# Altium PCB Sensor_PCB_S201_Flex.PcbDoc
Units mm, origin at the board's own origin, x right, y up, seen from the top; angles counter-clockwise.
Board outline 102 x 4 mm, 2 copper layers (1-SIG-TOP, 2-SIG_BOT), stack 0.109 mm thick; 21 components, 17 nets, 66 pads, 180 vias.
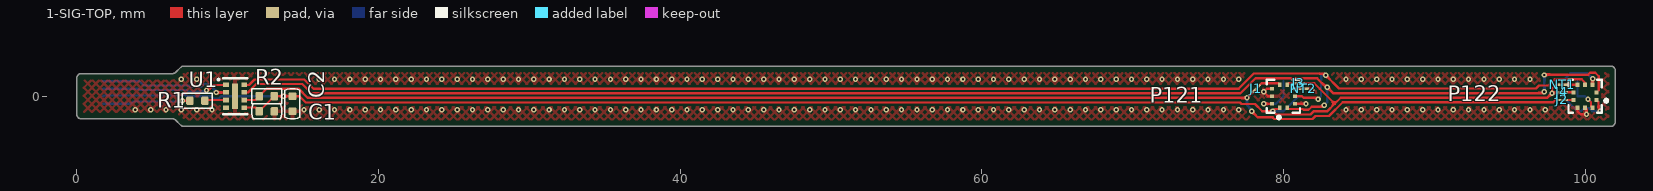
[diagram p0: 1-SIG-TOP view]
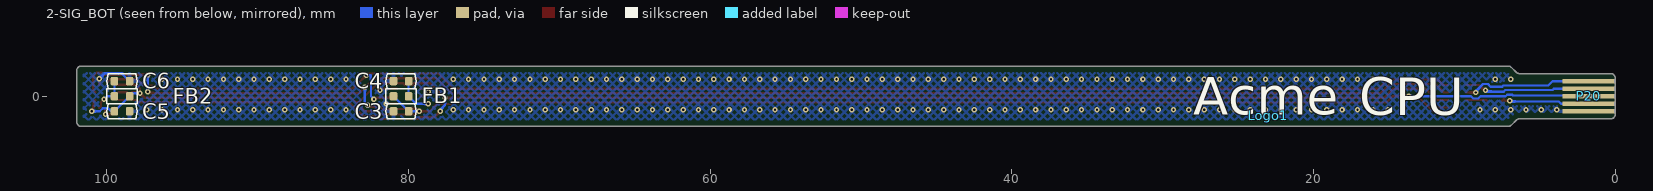
[diagram p1: 2-SIG_BOT view, seen from below]
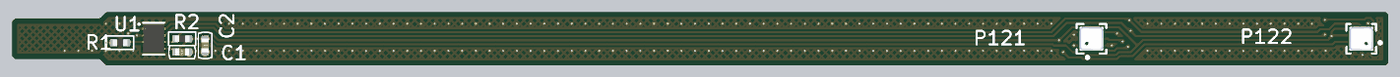
[diagram p2: 3D render of the assembled board from above, using the file's embedded part models]
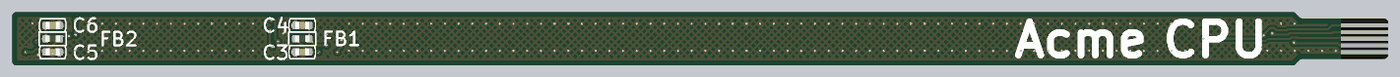
[diagram p3: 3D render of the assembled board from below, using the file's embedded part models]

## Layer stack, top to bottom
Top Solder: solder mask 0.0275, PI + Adhesive, Dk 3.4
1-SIG-TOP: signal copper 0.035
Dielectric 1: dielectric 0.0385, PI, Dk 3.4
2-SIG_BOT: signal copper 0.035
Bottom Solder: solder mask 0.0275, PI + Adhesive, Dk 3.4

## Board outline
0.3,-1.5 6.353,-1.5 6.353,-1.501 cw(c6.353,-1.801) 6.565,-1.589 6.888,-1.912 ccw(c7.1,-1.7) 7.1,-2 101.7,-2 ccw(c101.7,-1.7) 102,-1.7 102,1.7 ccw(c101.7,1.7) 101.7,2 7.1,2 ccw(c7.1,1.7) 6.888,1.912 6.565,1.589 cw(c6.353,1.801) 6.353,1.501 6.353,1.5 0.3,1.5 ccw(c0.3,1.2) 0,1.2 0,-1.2 ccw(c0.3,-1.2)

## Design rules (kind name [scope] priority, off if disabled: settings)
BoardOutlineClearance BoardOutlineClearance_LayerStack [WithinRoom('PCB_Stackup')] p1: gap=0 ignorepadtopadclearanceinfootprint=FALSE
BoardOutlineClearance BoardOutlineClearance_EDGE_Connector [HasFootprint('5-PIN FPC BOARD EDGE CONNECTOR 0.5MM')] p2: gap=0 ignorepadtopadclearanceinfootprint=FALSE
BoardOutlineClearance BoardOutlineClearance_LayerNames [WithinRoom('Layer_Names')] p3: gap=0 ignorepadtopadclearanceinfootprint=FALSE
BoardOutlineClearance BoardOutlineClearance_Overlays [OnBottomSilkscreen or OnTopSilkscreen] p4: gap=0 ignorepadtopadclearanceinfootprint=FALSE
BoardOutlineClearance BoardOutlineClearance_NearEdgeConnector [WithinRoom('NearEdgeConnector_OutlineClearance')] p5 off: gap=0.35 ignorepadtopadclearanceinfootprint=FALSE
BoardOutlineClearance [All] p6: gap=0.35 ignorepadtopadclearanceinfootprint=FALSE
Clearance [All] p1: gap=0.152 ignorepadtopadclearanceinfootprint=FALSE
ComponentClearance ComponentClearance_NetTie [HasFootprint('Net Tie 6x30mil')] p1: gap=0 collisioncheckmode=3 verticalgap=0 showdistances=FALSE
ComponentClearance ComponentClearance_PCB_Stackup [WithinRoom('PCB_Stackup')] p2: gap=0 collisioncheckmode=3 verticalgap=0 showdistances=FALSE
ComponentClearance [All] p3: gap=0.305 collisioncheckmode=3 verticalgap=0 showdistances=FALSE
DiffPairsRouting [All] p1: maxlimit=0.152 minlimit=0.127 mostfreqgap=0.152 toplayer_minwidth=0.127 toplayer_maxwidth=0.152 toplayer_prefwidth=0.152 bottomlayer_minwidth=0.127 bottomlayer_maxwidth=0.152 bottomlayer_prefwidth=0.152 maxuncoupledlength=12.7
HoleSize [All] p1: absolutevalues=TRUE maxlimit=2.54 minlimit=0.15 maxpercent=80.000 minpercent=20.000
HoleToHoleClearance [All] p1: gap=0.254 allowstackedmicrovias=FALSE
MinimumAnnularRing MinimumAnnularRing_Via_Int [IsVia and not (OnTopLayer or OnBottomLayer)] p1: minimumring=0
MinimumAnnularRing [All] p2: minimumring=0.152
MinimumSolderMaskSliver [All] p1: minsoldermaskwidth=0.076
PlaneClearance [All] p1: clearance=0.203
PlaneConnect PlaneConnect_Via [IsVia] p1: planeconnectstyle=Direct reliefexpansion=0.508 reliefentries=4 reliefconductorwidth=0.254 reliefairgap=0.254
PlaneConnect PlaneConnect_HeatTrap [All] p2: pad.planeconnectstyle=Relief pad.reliefexpansion=0.152 pad.reliefentries=4 pad.reliefconductorwidth=0.152 pad.reliefairgap=0.152 via.planeconnectstyle=Direct via.reliefexpansion=0.203 via.reliefentries=4 via.reliefconductorwidth=0.254 via.reliefairgap=0.254
PolygonConnect PolygonConnect_Via [IsVia] p1: connectstyle=Direct reliefconductorwidth=0.254 reliefentries=4 polygonreliefangle="90 Angle" airgapwidth=0.254
PolygonConnect PolygonConnect_TestPoints [InComponentClass('TestPoint')] p2: connectstyle=Direct reliefconductorwidth=0.254 reliefentries=4 polygonreliefangle="90 Angle" airgapwidth=0.254
PolygonConnect PolygonConnect_ThermPads [HasFootprintPad('DFN65P100X40-4N','5') or HasFootprintPad('WSON-6 065','7') or HasFootprintPad('SOT908-1','9')] p3: connectstyle=Direct reliefconductorwidth=0.254 reliefentries=4 polygonreliefangle="90 Angle" airgapwidth=0.254
PolygonConnect [All] p4: thpad.connectstyle=Relief thpad.reliefconductorwidth=0.381 thpad.reliefentries=4 thpad.polygonreliefangle="90 Angle" thpad.airgapwidth=0.203 smdpad.connectstyle=Relief smdpad.reliefconductorwidth=0.254 smdpad.reliefentries=4 smdpad.polygonreliefangle="90 Angle" smdpad.airgapwidth=0.203 via.connectstyle=Direct via.reliefconductorwidth=0.254 via.reliefentries=4 via.polygonreliefangle="90 Angle" via.airgapwidth=0.254
RoomDefinition Layer_Names [False] p1: confinementstyle=ConfineIn formatcopy=TRUE lockcomponents=FALSE outline 127.5,47.5 147.5,47.5 147.5,37.5 127.5,37.5
RoomDefinition NearEdgeConnector_OutlineClearance [False] p2: confinementstyle=ConfineIn formatcopy=TRUE lockcomponents=FALSE outline 0,1.5 7.5,1.5 7.5,-1.5 0,-1.5
RoomDefinition P122 [InComponentClass('P122')] p3: confinementstyle=ConfineIn formatcopy=TRUE lockcomponents=FALSE outline 98,1.5 98,-1.5 102,-1.5 102,1.5
RoomDefinition P121 [InComponentClass('P121')] p4: confinementstyle=ConfineIn formatcopy=TRUE lockcomponents=FALSE outline 78,1.5 78,-1.5 82,-1.5 82,1.5
RoutingVias [All] p1: holewidth=0.15 width=0.5 viastyle="Through Hole" minholewidth=0.15 minwidth=0.35 maxholewidth=0.5 maxwidth=0.7
SilkToSilkClearance [All] p1: silktosilkclearance=0.025
SilkToSolderMaskClearance [IsPad] p1: minsilkscreentomaskgap=0.102 clearancetoexposedcopper=FALSE
SolderMaskExpansion [All] p1: expansion=0.051
Width [All] p1: maxlimit=5.08 minlimit=0.152 preferedwidth=0.254
21 further rules are at their usual default settings.

## Classes and differential pairs
component class P121: C3 C4 FB1 NT2 P121
component class P122: C5 C6 FB2 NT1 P122
channel class BMP388_Digital_Pressure_Sensor: P121 P122
component class "Net Tie": J1 J2 J3 J4
component class PCB_FEATURE: Logo1

## Components (designator, comment, footprint, x,y, rotation, side; value= is the part's Value field where it differs from the comment)
C1 "CAP CER 0.1UF 50V X7R 0402" C0402 12.6,-1 r0 top
C2 "CAP CER 1UF 6.3V X5R 0402" C0402 14.3,-0.5 r90 top
C3 "CAP CER 0.1UF 16V X7R 0402" C0402 80.5,-1 r180 bottom (schematic designator C1)
C4 "CAP CER 0.1UF 16V X7R 0402" C0402 80.5,1 r0 bottom (schematic designator C2)
C5 "CAP CER 0.1UF 16V X7R 0402" C0402 99,-1 r0 bottom (schematic designator C1)
C6 "CAP CER 0.1UF 16V X7R 0402" C0402 99,1 r180 bottom (schematic designator C2)
FB1 "FERRITE BEAD 1 KOHM 0402 1LN" L0402 80.5,0 r180 bottom
FB2 "FERRITE BEAD 1 KOHM 0402 1LN" L0402 99,0 r0 bottom (schematic designator FB1)
J1 "Net Tie" "NET TIE 6X30MIL" 78.2,0.5 r45 top net-tie
J2 "Net Tie" "NET TIE 6X30MIL" 98.5,-0.25 r0 top net-tie
J3 "Net Tie" "NET TIE 6X30MIL" 81,0.854 r180 top net-tie
J4 "Net Tie" "NET TIE 6X30MIL" 98.5,0.255 r0 top net-tie
Logo1 "Logo ACME_CPU" LOGO_ACME_CPU 23,-1.3 r180 bottom (schematic designator Logo)
NT1 "Net Tie" "NET TIE 6X30MIL" 98.5,0.762 r180 top net-tie
NT2 "Net Tie" "NET TIE 6X30MIL" 81.322,0.5 r0 top net-tie
P20 "S201" "5-PIN FPC BOARD EDGE CONNECTOR 0.5MM" 1.75,0 r0 bottom
P121 "BMP388" QFN_BMP388_BOS 80,0 r90 top (schematic designator U1)
P122 "BMP388" QFN_BMP388_BOS 100,0 r180 top (schematic designator U1)
R1 "RES SMD 0 OHM JUMPER 1/16W 0402" R0402 8,-0.3 r180 top
R2 "DNP*" R0402 12.6,0 r0 top
U1 "TPD3F303DPVR" DPV8_1P7X0P4 10.5,0 r0 top

## Footprints (in the part's own frame and the unit in brackets; to place one, negate y for a bottom-side part, rotate by r counter-clockwise, add the part's x,y. Pads: shape width x height; smd on the part's side, far side on the other; paste and mask are expansions set on the pad)
"5-PIN FPC BOARD EDGE CONNECTOR 0.5MM" [mm] "5 Position FFC, FPC Connector Contacts, Top 0.020\" (0.50mm)"
  rect 3.5x0.3 smd paste+0 mask+0: 1(0,-1) 2(0,-0.5) 3(0,0) 4(0,0.5) 5(0,1)
C0402 [mm]
  rrect35% 0.5x0.55 smd: 1(-0.5,0) 2(0.5,0)
  silkscreen extent -1,-0.5 1,0.5, body extent -0.52,-0.28 0.52,0.28, height 0.55
DPV8_1P7X0P4 [mm]
  rect 0.38x0.3 smd paste+0 mask+0.05: 1(-0.61,0.75) 2(-0.61,0.25) 3(-0.61,-0.25) 4(-0.61,-0.75) 5(0.61,-0.75) 6(0.61,-0.25) 7(0.61,0.25) 8(0.61,0.75)
  rect 0.4x1.7 smd paste-0.837 mask+0.05: 9(0,0)
  silkscreen extent -1.15,-1.2 0.8,1.2, body extent -0.8,-1.05 0.8,1.05, height 0.65
L0402 [mm]
  rrect35% 0.5x0.55 smd: 1(-0.5,0) 2(0.5,0)
  silkscreen extent -1,-0.51 1,0.5, body extent -0.53,-0.25 0.53,0.25, height 0.71
LOGO_ACME_CPU [mm]
"NET TIE 6X30MIL" [mil]
  rect 16x6 smd paste-5 mask-5: 1(-7,0) 2(7,0)
QFN_BMP388_BOS [mm]
  rect 0.275x0.25 smd paste+0 mask+0.05: 1(-0.762,0.25) 2(-0.762,-0.25) 6(0.762,-0.25) 7(0.762,0.25)
  rect 0.25x0.275 smd paste+0 mask+0.05: 3(-0.5,-0.762) 4(0,-0.762) 5(0.5,-0.762) 8(0.5,0.762) 9(0,0.762) 10(-0.5,0.762)
  silkscreen extent -1.5,-1.1 1.1,1.1, body extent -1,-1 1,1, height 0.8
R0402 [mm]
  rrect35% 0.5x0.55 smd: 1(-0.5,0) 2(0.5,0)
  silkscreen extent -1,-0.51 1,0.5, body extent -0.53,-0.25 0.53,0.25, height 0.71

## Part data
C1: "0.1µF ±10% 50V Ceramic Capacitor X7R 0402 (1005 Metric)", Capacitance=100nF, Case/Package=0402, Case Code (Metric)=1005, Dielectric=X7R, Manufacturer=TDK, Manufacturer Part Number=CGA2B3X7R1H104K050BB, Max Operating Temperature=125°C, Min Operating Temperature=-55°C, Package Quantity=1, Ratings=AEC-Q200, Supplier Part Number 1=445-6899-1-ND, Tolerance=10%, Voltage=50V, Case Code (Imperial)=0402, ComponentLink1Description=http://product.tdk.com/capacitor/mlcc/en/documents/mlccspec_automotive_general_midvoltage_en.pdf?src-supplier=Future+Electronics, ComponentLink1URL=http://product.tdk.com/capacitor/mlcc/en/documents/mlccspec_automotive_general_midvoltage_en.pdf?src-supplier=Future+Electronics, ComponentLink2Description=http://www.farnell.com/datasheets/1807242.pdf?src-supplier=Element14, ComponentLink2URL=http://www.farnell.com/datasheets/1807242.pdf?src-supplier=Element14, ComponentLink3Description=http://www.mouser.com/ds/2/400/lcc_automotive_general_en-843974.pdf?src-supplier=Mouser, ComponentLink3URL=http://www.mouser.com/ds/2/400/lcc_automotive_general_en-843974.pdf?src-supplier=Mouser, ComponentLink4Description=http://www.farnell.com/datasheets/1936565.pdf?src-supplier=Element14, ComponentLink4URL=http://www.farnell.com/datasheets/1936565.pdf?src-supplier=Element14, ComponentLink5Description=http://www.farnell.com/datasheets/1735392.pdf?src-supplier=Element14, ComponentLink5URL=http://www.farnell.com/datasheets/1735392.pdf?src-supplier=Element14, Composition=Ceramic, Depth=0.5mm, Height=0.5mm, Lead Free="Lead Free", Length=1mm, Mount="Surface Mount", Packaging="Tape and Reel", Pricing 1="1=0.17, 10=0.118, 50=0.0668, 100=0.0553, 500=0.0388, 1000=0.0321, 2500=0.0299, 5000=0.0273 (USD)", REACH SVHC="No SVHC", Stock 1=2925303, Supplier 1=Digi-Key, Termination=SMD/SMT, Thickness=0.022inch, Voltage Rating=50V, Voltage Rating (DC)=50V, Weight=2.3E-05oz, Width=0.02inch
C2: "1µF ±10% 6.3V Ceramic Capacitor X5R 0402 (1005 Metric)", Capacitance=1uF, Case/Package=0402, Case Code (Metric)=1005, Dielectric=X5R, Dielectric Material=Ceramic, Manufacturer=Yageo, Manufacturer Part Number=CC0402KRX5R5BB105, Max Operating Temperature=85°C, Min Operating Temperature=-55°C, Package Quantity=1, Supplier Part Number 1=311-1438-1-ND, Tolerance=10%, Voltage Rating=6.3V, Case Code (Imperial)=0402, ComponentLink1Description=http://www.farnell.com/datasheets/70765.pdf?src-supplier=Farnell, ComponentLink1URL=http://www.farnell.com/datasheets/70765.pdf?src-supplier=Farnell, ComponentLink2Description=http://www.yageo.com/documents/recent/UPY-GPHC_X5R_4V-to-50V_25.pdf?src-supplier=Digi-Key, ComponentLink2URL=http://www.yageo.com/documents/recent/UPY-GPHC_X5R_4V-to-50V_25.pdf?src-supplier=Digi-Key, ComponentLink3Description=http://www.farnell.com/datasheets/2167237.pdf?src-supplier=Element14, ComponentLink3URL=http://www.farnell.com/datasheets/2167237.pdf?src-supplier=Element14, ComponentLink4Description=http://www.yageo.com/documents/recent/UPY-GPHC_X5R_4V-to-50V_12.pdf?src-supplier=Avnet+Europe, ComponentLink4URL=http://www.yageo.com/documents/recent/UPY-GPHC_X5R_4V-to-50V_12.pdf?src-supplier=Avnet+Europe, ComponentLink5Description=http://www.farnell.com/datasheets/1359354.pdf?src-supplier=Element14, ComponentLink5URL=http://www.farnell.com/datasheets/1359354.pdf?src-supplier=Element14, ComponentLink6Description=http://www.farnell.com/datasheets/70765.pdf?src-supplier=Element14, ComponentLink6URL=http://www.farnell.com/datasheets/70765.pdf?src-supplier=Element14, ComponentLink7Description=http://www.yageo.com/documents/recent/UPY-GPHC_X5R_4V-to-50V_12.pdf?src-supplier=Avnet, ComponentLink7URL=http://www.yageo.com/documents/recent/UPY-GPHC_X5R_4V-to-50V_12.pdf?src-supplier=Avnet, Composition=Ceramic, Depth=0.5mm, Halogen Free="Halogen Free", Height=0.5mm, Lead Free="Lead Free", Length=1mm, Mount="Surface Mount", Number of Pins=2, Packaging="Tape and Reel", Pricing 1="1=0.1, 10=0.05, 50=0.0272, 100=0.0222, 500=0.0158, 1000=0.0124, 2500=0.0113, 5000=0.0104 (USD)", Radiation Hardening=No, REACH SVHC="No SVHC", Stock 1=34926286, Supplier 1=Digi-Key, Termination=SMD/SMT, Thickness=0.022inch, Voltage Rating (DC)=6.3V, Width=0.02inch
C3 C4 C5 C6: "0.1µF ±10% 16V Ceramic Capacitor X7R 0402 (1005 Metric)", Capacitance=100nF, Case Code (Imperial)=0402, Case Code (Metric)=1005, Dielectric=X7R, Manufacturer=YAGEO, Manufacturer Part Number=CC0402KRX7R7BB104, Max Operating Temperature=125°C, Min Operating Temperature=-55°C, Package Quantity=1, Supplier Part Number 1=311-1338-1-ND, Tolerance=10%, Voltage=16V, ComponentLink1Description=http://www.yageo.com/documents/recent/UPY-GPHC_X7R_6.3V-to-50V_8.pdf?src-supplier=Avnet+Europe, ComponentLink1URL=http://www.yageo.com/documents/recent/UPY-GPHC_X7R_6.3V-to-50V_8.pdf?src-supplier=Avnet+Europe, ComponentLink2Description=http://www.yageo.com/documents/recent/UPY-GPHC_X7R_6.3V-to-50V_18.pdf?src-supplier=Digi-Key, ComponentLink2URL=http://www.yageo.com/documents/recent/UPY-GPHC_X7R_6.3V-to-50V_18.pdf?src-supplier=Digi-Key, ComponentLink3Description=http://www.yageo.com/documents/recent/UPY-GPHC_X7R_6.3V-to-50V_8.pdf?src-supplier=Avnet, ComponentLink3URL=http://www.yageo.com/documents/recent/UPY-GPHC_X7R_6.3V-to-50V_8.pdf?src-supplier=Avnet, ComponentLink4Description=http://www.yageo.com/documents/recent/UPY-GPHC_X7R_6.3V-to-50V_18.pdf?src-supplier=Mouser, ComponentLink4URL=http://www.yageo.com/documents/recent/UPY-GPHC_X7R_6.3V-to-50V_18.pdf?src-supplier=Mouser, ComponentLink5Description=http://www.farnell.com/datasheets/2167236.pdf?src-supplier=Element14, ComponentLink5URL=http://www.farnell.com/datasheets/2167236.pdf?src-supplier=Element14, ComponentLink6Description=http://www.farnell.com/datasheets/1489800.pdf?src-supplier=Element14, ComponentLink6URL=http://www.farnell.com/datasheets/1489800.pdf?src-supplier=Element14, Composition=Ceramic, Depth=0.5mm, Halogen Free="Halogen Free", Height=0.5mm, Lead Free="Lead Free", Length=1mm, Mount="Surface Mount", Number of Pins=2, Order=CC0402KRX7R7BB104, Packaging="Tape and Reel", Pricing 1="1=0.1, 10=0.031, 100=0.0136, 500=0.0097, 1000=0.0077, 2500=0.007, 5000=0.0064 (USD)", Radiation Hardening=No, REACH SVHC="No SVHC", Revision="July-2002: Re-released for DXP Platform.", Stock 1=25916830, Supplier 1=Digi-Key, Termination=SMD/SMT, Thickness=0.022inch, Voltage Rating=16V, Voltage Rating (DC)=16V, Width=0.02inch
FB1 FB2: "1 kOhms @ 100MHz 1  Ferrite Bead 0402 (1005 Metric) 350mA 490mOhm", Case/Package=0402, Case Code (Metric)=1005, Current Rating=350mA, DC Resistance (DCR)=490mR, Manufacturer=Murata, Manufacturer Part Number=BLM15AX102SN1D, Max Operating Temperature=125°C, Min Operating Temperature=-55°C, Package Quantity=1, Supplier Part Number 1=490-5442-1-ND, Test Frequency=100MHz, Tolerance=25%, Case Code (Imperial)=0402, ComponentLink1Description=https://www.murata.com/en-us/products/productdata/8796740059166/ENFA0018.pdf?src-supplier=Digi-Key, ComponentLink1URL=https://www.murata.com/en-us/products/productdata/8796740059166/ENFA0018.pdf?src-supplier=Digi-Key, ComponentLink2Description=http://search.murata.co.jp/Ceramy/image/img/PDF/ENG/L0110S0100BLM15AX_SN.pdf?src-supplier=Future+Electronics, ComponentLink2URL=http://search.murata.co.jp/Ceramy/image/img/PDF/ENG/L0110S0100BLM15AX_SN.pdf?src-supplier=Future+Electronics, ComponentLink3Description=http://www.produktinfo.conrad.com/datenblaetter/1100000-1199999/001171674-da-01-en-CHIP_DROSSEL0402_1000R_350MA_1_0X0_5MM.pdf?src-supplier=Conrad, ComponentLink3URL=http://www.produktinfo.conrad.com/datenblaetter/1100000-1199999/001171674-da-01-en-CHIP_DROSSEL0402_1000R_350MA_1_0X0_5MM.pdf?src-supplier=Conrad, ComponentLink4Description=http://www.produktinfo.conrad.com/datenblaetter/1100000-1199999/001172166-da-01-en-DROSSEL_0402_1000R_31_0X0_5MM_10000ST.pdf?src-supplier=Conrad, ComponentLink4URL=http://www.produktinfo.conrad.com/datenblaetter/1100000-1199999/001172166-da-01-en-DROSSEL_0402_1000R_31_0X0_5MM_10000ST.pdf?src-supplier=Conrad, Depth=0.5mm, Height=0.5mm, Impedance=1kR, Lead Free="Lead Free", Length=1mm, Material=Ferrite,Steel, Max Current Rating=350mA, Max DC Current=350mA, Number of Circuits=1, Number of Lines=1, Number of Pins=2, Packaging="Tape and Reel", Pricing 1="1=0.11, 10=0.09, 25=0.0812, 50=0.0596, 100=0.0514, 250=0.0406, 500=0.0343, 1000=0.0289, 5000=0.0257 (USD)", REACH SVHC="No SVHC", Stock 1=138597, Supplier 1=Digi-Key, Termination=SMD/SMT, Width=0.5mm
J1 J2 J3 J4 NT1 NT2: library part "Net Tie Line"
  J1 J2 J3 J4: ClassName="Net Tie"
  NT1: ClassName=P122
  NT2: ClassName=P121
P20: library part "CONN HEADER TH R/A 5POS 1.5MM", "Connector Header Through Hole, Right Angle 5 position 0.059\" (1.50mm)", Color=Natural, Contact Resistance=30mR, Current Rating=1A, Housing Color=Beige, Manufacturer=JST, Manufacturer Part Number=S5B-ZR(LF)(SN), Max Operating Temperature=85°C, Max Voltage Rating (AC)=50V, Min Operating Temperature=-25°C, Supplier Part Number 1=455-1672-ND, ComponentLink1Description=http://www.jst-mfg.com/product/pdf/eng/eZH.pdf?src-supplier=Digi-Key, ComponentLink1URL=http://www.jst-mfg.com/product/pdf/eng/eZH.pdf?src-supplier=Digi-Key, ComponentLink2Description=https://www.verical.com/server-webapp/html/getDatasheet?partID=640593&src-supplier=Verical, ComponentLink2URL=https://www.verical.com/server-webapp/html/getDatasheet?partID=640593&src-supplier=Verical, ComponentLink3Description=http://www1.futureelectronics.com/doc/JST/S5B-ZR(LF)(SN).pdf?src-supplier=Future+Electronics, ComponentLink3URL=http://www1.futureelectronics.com/doc/JST/S5B-ZR(LF)(SN).pdf?src-supplier=Future+Electronics, ComponentLink4Description=http://www.produktinfo.conrad.com/datenblaetter/725000-749999/741204-da-01-en-STIFTLEISTE_GEWINKELT_5_POL_RM1_5.pdf?src-supplier=Conrad, ComponentLink4URL=http://www.produktinfo.conrad.com/datenblaetter/725000-749999/741204-da-01-en-STIFTLEISTE_GEWINKELT_5_POL_RM1_5.pdf?src-supplier=Conrad, Connector Type="Male Pin", Contact Material=Brass,Tin, Contact Mating Length=0.094inch, Contact Plating=Tin,Copper, Depth=6mm, Fastening Type=Detent, Gender=Male, Height=7.2mm, Housing Material=Polyamide, Lead Free="Lead Free", Length=9mm, Max Current Rating=1A, Mount="Through Hole", Number of Contacts=5, Number of Pins=5, Number of Positions=5, Number of Rows=1, Orientation="Right Angle", Packaging=Bulk, pin_1=SCL, pin_2=SDA, pin_3=VDD, pin_4=GPIO, pin_5=GND, Pitch=1.5mm, Pricing 1="1=0.29, 10=0.272, 100=0.1889, 500=0.1598, 1000=0.1308, 5000=0.1162, 10000=0.1053 (USD)", Stock 1=41138, Supplier 1=Digi-Key, Termination=Press-Fit, Voltage Rating=50V, Width=3.5mm
P121 P122: library part "IC BMP388 SENSOR PRESSURE ABS", "Pressure Sensor 4.35PSI ~ 18.13PSI (30kPa ~ 125kPa) Absolute   10-WFLGA", Capacitance=4.7uF, Case/Package=LGA, Case Code (Imperial)=0805, Case Code (Metric)=2012, Continuous Drain Current (ID)=4A, Drain to Source Voltage (Vdss)=30V, Input Capacitance=645pF, Manufacturer="Bosch Sensortec", Max Operating Temperature=150°C, Max Power Dissipation=1.4W, Min Operating Temperature=-55°C, Operating Pressure=18.13PSI, Ratings=AEC-Q200, Supplier Part Number 1=828-1079-1-ND, Tolerance=20%, Voltage Rating=16V, ComponentLink1Description=https://ae-bst.resource.bosch.com/media/_tech/media/datasheets/BST-BMP388-DS001.pdf?src-supplier=Digi-Key, ComponentLink1URL=https://ae-bst.resource.bosch.com/media/_tech/media/datasheets/BST-BMP388-DS001.pdf?src-supplier=Digi-Key, ComponentLink2Description=https://ae-bst.resource.bosch.com/media/_tech/media/product_flyer/BST-BMP388-FL000-00.pdf?src-supplier=Digi-Key, ComponentLink2URL=https://ae-bst.resource.bosch.com/media/_tech/media/product_flyer/BST-BMP388-FL000-00.pdf?src-supplier=Digi-Key, ComponentLink3Description=https://ae-bst.resource.bosch.com/media/_tech/media/application_notes/BST-BMP380-HS000.pdf?src-supplier=Digi-Key, ComponentLink3URL=https://ae-bst.resource.bosch.com/media/_tech/media/application_notes/BST-BMP380-HS000.pdf?src-supplier=Digi-Key, Features="Soft Termination", Manufacturer Part Number=BMP388, Mount="Surface Mount", Number of Pins=10, Output Type=SPI,I2C, Packaging="Tape and Reel", Port Style="No Port", Pressure Type=Absolute, Pricing 1="1=3.81, 5=3.366, 10=2.973, 25=2.4124, 50=2.1318, 100=2.0757, 500=1.7391, 1000=1.6269, 5000=1.5147 (USD)", Rds On Max=50mR, Stock 1=30816, Supplier 1=Digi-Key, Termination=SMD/SMT
R1: "0 Ohms Jumper 0.063W, 1/16W Chip Resistor 0402 (1005 Metric) Moisture Resistant Thick Film", Case/Package=0402, Case Code (Metric)=1005, Manufacturer=Yageo, Manufacturer Part Number=RC0402JR-070RL, Max Operating Temperature=155°C, Max Power Dissipation=63mW, Min Operating Temperature=-55°C, Package Quantity=1, Power Rating=62.5mW, Resistance="0 Ohm", Supplier Part Number 1=311-0.0JRCT-ND, Temperature Coefficient=200ppm/°C, Tolerance=5%, Voltage Rating=50V, Case Code (Imperial)=0402, ComponentLink1Description=http://www.yageo.com/documents/recent/PYu-RC_Group_51_RoHS_L_10.pdf?src-supplier=Digi-Key, ComponentLink1URL=http://www.yageo.com/documents/recent/PYu-RC_Group_51_RoHS_L_10.pdf?src-supplier=Digi-Key, ComponentLink2Description=http://www.yageo.com/documents/recent/PYu-RC0402_51_RoHS_L_6.pdf?src-supplier=Avnet+Europe, ComponentLink2URL=http://www.yageo.com/documents/recent/PYu-RC0402_51_RoHS_L_6.pdf?src-supplier=Avnet+Europe, ComponentLink3Description=http://www.farnell.com/datasheets/1018594.pdf?src-supplier=Element14, ComponentLink3URL=http://www.farnell.com/datasheets/1018594.pdf?src-supplier=Element14, ComponentLink4Description=https://www.verical.com/server-webapp/html/getDatasheet?partID=326379&src-supplier=Verical, ComponentLink4URL=https://www.verical.com/server-webapp/html/getDatasheet?partID=326379&src-supplier=Verical, ComponentLink5Description=http://www.farnell.com/datasheets/2167052.pdf?src-supplier=Element14, ComponentLink5URL=http://www.farnell.com/datasheets/2167052.pdf?src-supplier=Element14, Composition="Thick Film", Contact Plating=Tin,Matte, Depth=0.5mm, Features="Moisture Resistant", Height=0.016inch, Lead Free="Lead Free", Length=1mm, Military Standard=Not, Number of Terminations=2, Packaging="Tape and Reel", Pricing 1="1=0.1, 10=0.013, 25=0.0092, 50=0.0072, 100=0.0053, 250=0.004, 500=0.0032, 1000=0.0024, 5000=0.0017 (USD)", Radiation Hardening=No, REACH SVHC=Unknown, Stock 1=46057148, Supplier 1=Digi-Key, Termination=SMD/SMT, Width=0.02inch
R2: library part "RES SMD NO BOM 0402", "Placeholder for a 0402 resistor", Case/Package=0402
U1: library part "FILTER RC(PI) ESD SMD  8-UFDFN EP", "RC (Pi) EMI Filter 2nd Order Low Pass 3 Channel R = 47Ohms, 100Ohms, C = 20pF  8-UFDFN Exposed Pad", Capacitance=20pF, Case/Package=SMD/SMT, Clamping Voltage=10V, Frequency=308MHz, Manufacturer="Texas Instruments", Max Operating Temperature=85°C, Min Operating Temperature=-40°C, Operating Supply Voltage=5.5V, Package Quantity=1, Supplier Part Number 1=296-28299-1-ND, ComponentLink1Description=http://www.ti.com/lit/ds/symlink/tpd3f303.pdf?src-supplier=Digi-Key, ComponentLink1URL=http://www.ti.com/lit/ds/symlink/tpd3f303.pdf?src-supplier=Digi-Key, ComponentLink2Description=http://focus.ti.com/lit/ds/symlink/tpd3f303.pdf?src-supplier=Avnet+Europe, ComponentLink2URL=http://focus.ti.com/lit/ds/symlink/tpd3f303.pdf?src-supplier=Avnet+Europe, ComponentLink3Description=https://www.verical.com/server-webapp/html/getDatasheet?partID=302817&src-supplier=Verical, ComponentLink3URL=https://www.verical.com/server-webapp/html/getDatasheet?partID=302817&src-supplier=Verical, ComponentLink4Description=http://www.farnell.com/datasheets/1558442.pdf?src-supplier=Element14, ComponentLink4URL=http://www.farnell.com/datasheets/1558442.pdf?src-supplier=Element14, Contact Plating=Gold, Depth=1.7mm, ESD Protection=Yes, Height=0.026inch, Lead Free="Lead Free", Length=2.2mm, Manufacturer Part Number=TPD3F303DPVR, Number of Channels=3, Number of Pins=8, Packaging="Tape and Reel", Pricing 1="1=0.85, 10=0.812, 25=0.7856, 50=0.6414, 100=0.576, 250=0.5236, 500=0.4974, 1000=0.4451 (USD)", Radiation Hardening=No, REACH SVHC="No SVHC", Stock 1=4896, Supplier 1=Digi-Key, Termination=Flat, Width=0.063inch
Logo1: ClassName=PCB_FEATURE

## Via types
v1: diameter 0.35, hole 0.15, 1-SIG-TOP to 2-SIG_BOT, tented both sides, 180 vias

## Nets (pads, with @x,y where several pads share a name; then routed paths per layer and width w, separated by ;. In a path a pad name is that pad's centre, name@x,y a point inside that pad or via, vN(x,y) a via of type N, cw(c..) or ccw(c..) an arc to the next point about the centre after c; other vN are vias at no path point)
+3V3: C1.1 C2.2 C3.2 C5.2 FB1.1 FB2.1 J3.1 J4.1 NT1.2 P20.3 P121.1 P122.1 R2.2 U1.5 | length 112.1
  1-SIG-TOP w0.152: U1.5 11.85,-0.75 C1.1 R2.2 v1(13.7,0) C2.2 14.769,0 15.183,-0.414 77.12,-0.414 77.219,-0.513 78.113,-0.513 78.6,-1 v1@79.288,-1 ; v1@79.323,-0.965 79.434,-0.854 79.658,-0.854 P121.1 ; J3.1 82.046,0.854 82.404,0.496 83.4,-0.5 ; J4.1 97.855,0.255 v1(97.8,0.2) ; NT1.2 98.062,0.762 97.8,0.5 v1(97.8,0.2) ; P122.1 100.889,-0.377 100.889,-0.889 v1(101,-1) ; v1@79.288,-1 v1@79.3,-0.988 ; v1@79.288,-1 v1(79.3,-1) v1@79.3,-0.988 ; v1@79.3,-0.988 79.52,-1.208 81.793,-1.208 81.997,-1.005 82.895,-1.005 83.4,-0.5 ; 83.4,-0.5 83.8,-0.1 97.5,-0.1 v1(97.8,0.2)
  2-SIG_BOT w0.152: P20.3 1.801,0.051 6.78,0.051 6.833,0.104 7.167,0.104 7.274,-0.004 8.926,-0.004 8.929,0 9.083,-0.154 9.417,-0.154 9.571,0 v1(13.7,0) ; v1(79.3,-1) 79.4,-1 C3.2 FB1.1 ; v1(97.8,0.2) 98.3,0.2 FB2.1 C5.2 99.729,-1 99.933,-0.797 100.267,-0.797 100.47,-1 v1(101,-1)
\INT: J1.1 J2.1 R2.1 U1.6 | length 89.9
  1-SIG-TOP w0.152: U1.6 11.85,-0.25 R2.1 12.604,0.504 14.696,0.504 15.31,-0.11 v1(77.59,-0.11) J1.1 ; v1(77.9,-1) 78.303,-1.404 79.284,-1.404 79.394,-1.513 81.92,-1.513 82.123,-1.31 83.021,-1.31 83.926,-0.405 97.885,-0.405 98.039,-0.25 J2.1
  2-SIG_BOT w0.152: v1(77.59,-0.11) 77.59,-0.59 77.9,-0.9 v1(77.9,-1)
\P121.INT: J1.2 P121.7 | length 1.6
  1-SIG-TOP w0.152: J1.2 78.554,0.854 79.658,0.854 P121.7
\P122.INT: J2.2 P122.7 | length 0.6
  1-SIG-TOP w0.152: J2.2 P122.7
GND: C1.2 C2.1 C3.1 C4.2 C5.1 C6.2 NT2.2 P20.5 P121.3 P121.8 P121.9 P122.3 P122.8 P122.9 U1.9 | length 6.6
  1-SIG-TOP w0.152: P121.9 79,0 v1(78.7,0.3) 78.9,0.5 P121.8 ; P121.3 v1(81.5,-0.5) ; NT2.2 81.8,0.5 v1(81.9,0.4) ; P122.8 99.5,-1 99.7,-1.2 v1(100.1,-1.2) 100.1,-0.862 P122.9 ; P122.3 v1(100.5,1.154)
  2-SIG_BOT w0.152: C6.2 99.014,1.514 100.14,1.514 v1(100.5,1.154)
  other v1: 3.885,-0.902 4.901,-0.902 5.917,-0.902 6.933,-0.902 7.949,-0.902 8.965,-0.902 15.061,-0.902 16.077,-0.902 17.093,-0.902 18.109,-0.902 19.125,-0.902 20.141,-0.902 21.157,-0.902 22.173,-0.902 23.189,-0.902 24.205,-0.902 25.221,-0.902 26.237,-0.902 27.253,-0.902 28.269,-0.902 29.285,-0.902 30.301,-0.902 31.317,-0.902 32.333,-0.902 33.349,-0.902 34.365,-0.902 35.381,-0.902 36.397,-0.902 37.413,-0.902 38.429,-0.902 39.445,-0.902 40.461,-0.902 41.477,-0.902 42.493,-0.902 43.509,-0.902 44.525,-0.902 45.541,-0.902 46.557,-0.902 47.573,-0.902 48.589,-0.902 49.605,-0.902 50.621,-0.902 51.637,-0.902 52.653,-0.902 53.669,-0.902 54.685,-0.902 55.701,-0.902 56.717,-0.902 57.733,-0.902 58.749,-0.902 59.765,-0.902 60.781,-0.902 61.797,-0.902 62.813,-0.902 63.829,-0.902 64.845,-0.902 65.861,-0.902 66.877,-0.902 67.893,-0.902 68.909,-0.902 69.925,-0.902 70.941,-0.902 71.957,-0.902 72.973,-0.902 73.989,-0.902 75.005,-0.902 76.021,-0.902 77.037,-0.902 84.149,-0.902 85.165,-0.902 86.181,-0.902 87.197,-0.902 88.213,-0.902 89.229,-0.902 90.245,-0.902 91.261,-0.902 92.277,-0.902 93.293,-0.902 94.309,-0.902 95.325,-0.902 96.341,-0.902 97.357,-0.902 6.933,1.13 7.949,1.13 16.077,1.13 17.093,1.13 18.109,1.13 19.125,1.13 20.141,1.13 21.157,1.13 22.173,1.13 23.189,1.13 24.205,1.13 25.221,1.13 26.237,1.13 27.253,1.13 28.269,1.13 29.285,1.13 30.301,1.13 31.317,1.13 32.333,1.13 33.349,1.13 34.365,1.13 35.381,1.13 36.397,1.13 37.413,1.13 38.429,1.13 39.445,1.13 40.461,1.13 41.477,1.13 42.493,1.13 43.509,1.13 44.525,1.13 45.541,1.13 46.557,1.13 47.573,1.13 48.589,1.13 49.605,1.13 50.621,1.13 51.637,1.13 52.653,1.13 53.669,1.13 54.685,1.13 55.701,1.13 56.717,1.13 57.733,1.13 58.749,1.13 59.765,1.13 60.781,1.13 61.797,1.13 62.813,1.13 63.829,1.13 64.845,1.13 65.861,1.13 66.877,1.13 67.893,1.13 68.909,1.13 69.925,1.13 70.941,1.13 71.957,1.13 72.973,1.13 73.989,1.13 75.005,1.13 76.021,1.13 77.037,1.13 84.149,1.13 85.165,1.13 86.181,1.13 87.197,1.13 88.213,1.13 89.229,1.13 90.245,1.13 91.261,1.13 92.277,1.13 93.293,1.13 94.309,1.13 95.325,1.13 96.341,1.13
I2C.SCL: P121.2 P122.2 U1.7 | length 97.4
  1-SIG-TOP w0.152: U1.7 11.35,0.25 11.908,0.808 14.95,0.808 15.563,0.195 77.156,0.195 78.156,1.195 82.234,1.195 82.829,0.6 v1(82.9,0.6) 83.295,0.205 97.199,0.205 v1(97.298,0.304) ; P121.2 80.342,-0.854 81.283,-0.854 81.333,-0.904 81.667,-0.904 81.871,-0.7 82.6,-0.7 v1(82.7,-0.6) ; v1(97.3,1.4) 97.333,1.433 100.209,1.433 100.333,1.557 100.667,1.557 100.904,1.321 100.904,0.392 P122.2
  2-SIG_BOT w0.152: v1(82.7,-0.6) 82.9,-0.4 ; 82.9,-0.4 v1(82.9,0.6) ; v1(97.298,0.304) 97.3,0.306 v1(97.3,1.4)
I2C.SDA: P121.4 P122.4 U1.8 | length 94.2
  1-SIG-TOP w0.152: U1.8 11.419,0.75 11.782,1.113 15.087,1.113 15.7,0.5 77.03,0.5 78.03,1.5 82.701,1.5 v1(82.804,1.397) 83.691,0.51 96.75,0.51 96.952,0.711 97.58,0.711 97.757,0.888 97.997,1.128 99.772,1.128 100,0.9 P122.4 ; P121.4 81.229,0 81.329,-0.1 81.333,-0.096 82.196,-0.096 v1(82.3,-0.2)
  2-SIG_BOT w0.152: v1(82.3,-0.2) 82.496,-0.004 82.496,1.067 82.5,1.071 82.5,1.4 82.503,1.397 v1(82.804,1.397)
NetC4_1: C4.1 FB1.2 P121.10 | length 3
  1-SIG-TOP w0.152: v1(78.7,-0.5) P121.10
  2-SIG_BOT w0.152: v1(78.7,-0.5) 79.5,-0.5 FB1.2 C4.1
NetC6_1: C6.1 FB2.2 P122.10 | length 2.5
  1-SIG-TOP w0.152: v1(100.2,-0.2) 100.396,-0.396 100.396,-0.658 P122.10
  2-SIG_BOT w0.152: C6.1 FB2.2 100,0 v1(100.2,-0.2)
NetJ3_2: J3.2 P121.6 | length 0.6
  1-SIG-TOP w0.152: P121.6 80.262,0.762 80.354,0.854 J3.2
NetJ4_2: J4.2 P122.6 | length 0.6
  1-SIG-TOP w0.152: J4.2 99.233,0.255 P122.6
NetR1_1: R1.1 U1.3 | length 1.4
  1-SIG-TOP w0.152: R1.1 8.55,-0.25 U1.3
P20_GPIO: P20.4 R1.2 | length 5.9
  1-SIG-TOP w0.152: v1(7,-0.3) 7.3,-0.3 7.4,-0.2 R1.2
  2-SIG_BOT w0.152: P20.4 3.6,-0.5 3.744,-0.356 6.944,-0.356 v1(7,-0.3)
P20_SCL: P20.1 U1.2 | length 8.6
  1-SIG-TOP w0.152: v1(9.25,0.25) U1.2
  2-SIG_BOT w0.152: P20.1 4.156,1 4.443,0.713 7.42,0.713 7.498,0.635 8.264,0.635 8.433,0.804 8.767,0.804 9.25,0.321 v1(9.25,0.25)
P20_SDA: P20.2 U1.1 | length 8.4
  1-SIG-TOP w0.152: v1(8.6,0.4) 8.7,0.4 9.05,0.75 U1.1
  2-SIG_BOT w0.152: P20.2 4.071,0.5 4.162,0.408 7.293,0.408 7.397,0.305 8.505,0.305 v1(8.6,0.4)
P121.A0: NT2.1 P121.5 | length 0.4
  1-SIG-TOP w0.152: P121.5 NT2.1
P122.A0: NT1.1 P122.5 | length 0.8
  1-SIG-TOP w0.152: NT1.1 P122.5
pads on no net: U1.4

## Polygon pours and split planes (outlines as drawn)
no net on PCB Mech TOP "NONET_L-01_P-001" (solid): 78,2 78,-2 101.7,-2 ccw(c101.7,-1.7) 102,-1.7 102,1.7 ccw(c101.7,1.7) 101.7,2
GND on 1-SIG-TOP "GND_L01_P112" (hatched 45Degree grid 0.381 track 0.152, remove dead copper, pour order 112): 0,2 102,2 102,-2 0,-2
GND on 2-SIG_BOT "GND_L02_P131" (hatched 45Degree grid 0.381 track 0.152, remove dead copper, pour order 131): 0,2 102,2 102,-2 0,-2

## Keep-outs
Keep-Out Layer:
  text "'.Layer_Name'" at 130,2.5 h2.5

## Other copper
1-SIG-TOP:
  text "'.Layer_Name'" at 130,42.5 h2.5
2-SIG_BOT:
  text "'.Layer_Name'" at 145,40 h2.5

## Silkscreen, mask and mechanical layers (free items; w line width, h text height)
Top Overlay:
  text "'.Layer_Name'" at 130,2.5 h2.5
Bottom Overlay:
  text "'.Layer_Name'" at 145,0 h2.5
Top Paste:
  text "'.Layer_Name'" at 130,17.5 h2.5
Bottom Paste:
  text "'.Layer_Name'" at 145,15 h2.5
Top Solder:
  text "'.Layer_Name'" at 130,12.5 h2.5
Bottom Solder:
  text "'.Layer_Name'" at 145,10 h2.5
Drill Guide:
  text "'.Layer_Name'" at 130,5 h2.5
PCB Mech TOP:
  pour cut-out: 98.7,1.3 101.3,1.3 101.3,-1.3 98.7,-1.3
  pour cut-out: 78.7,1.3 81.3,1.3 81.3,-1.3 78.7,-1.3
  lines w0.05: 79.5,0 80.5,0 ; 80,-0.5 80,0.5 ; 99.5,0 100.5,0 ; 100,-0.5 100,0.5
  lines w0.2: 78,-2 78,2 101.7,2 cw(c101.7,1.7) 102,1.7 102,-1.7 cw(c101.7,-1.7) 101.7,-2 78,-2 ; 78.7,-1.3 78.7,1.3 81.3,1.3 81.3,-1.3 78.7,-1.3 ; 98.7,-1.3 101.3,-1.3 101.3,1.3 98.7,1.3 98.7,-1.3
  text "Tesa_8854 tape" at 85.2,6.6 h2.5
  text "Stiffener" at -0.2,5.3 h2.5
Dimensions:
  text "'.Layer_Name'" at 130,35 h2.5
Fiducials:
  text "'.Layer_Name'" at 130,32.5 h2.5
Outline:
  lines w0.1: 6.353,-1.501 cw(c6.353,-1.801) 6.565,-1.589 6.888,-1.912 ccw(c7.1,-1.7) 7.1,-2 15.4,-2 77.1,-2 82,-2 98,-2 101.7,-2 ccw(c101.7,-1.7) 102,-1.7 102,1.7 ccw(c101.7,1.7) 101.7,2 98,2 82,2 77.1,2 15.4,2 7.1,2 ccw(c7.1,1.7) 6.888,1.912 6.565,1.589 cw(c6.353,1.801) 6.353,1.501 ; 6.353,-1.5 0.3,-1.5 cw(c0.3,-1.2) 0,-1.2 0,1.2 cw(c0.3,1.2) 0.3,1.5 6.353,1.5
  text "'.Layer_Name'" at 130,30 h2.5
3D Body TOP:
  text "'.Layer_Name'" at 130,27.5 h2.5
TOP ASSY:
  text "'.Layer_Name'" at 130,17.5 h2.5
Courtyard TOP:
  text "'.Layer_Name'" at 130,25 h2.5
PCB Sheet:
  lines w0.7: -25.88,-228.2 -25.88,68.8 ; -25.88,-153.95 -20.88,-153.95 ; -25.88,-79.7 -20.88,-79.7 ; -25.88,-5.45 -20.88,-5.45 ; -20.88,-192.513 44.727,-192.513 82.827,-192.513 159.12,-192.513 ; 17.227,-223.2 17.227,-192.513 ; 17.227,-215.373 159.12,-215.373 ; 17.227,-207.753 159.12,-207.753 ; 17.227,-200.133 159.12,-200.133 ; 39.19,-228.2 39.19,-223.2 ; 39.19,63.8 39.19,68.8 ; 72.667,-223.2 72.667,-207.753 72.667,-192.513 ; 99.12,-228.2 99.12,-223.2 ; 99.12,63.8 99.12,68.8 ; 126.007,-223.2 126.007,-207.753 ; 159.12,-153.95 164.12,-153.95 ; 159.12,-79.7 164.12,-79.7 ; 159.12,-5.45 164.12,-5.45 ; -45.88,-228.2 -45.88,68.8 164.12,68.8 164.12,-228.2 -45.88,-228.2 ; -20.88,-223.2 159.12,-223.2 159.12,63.8 -20.88,63.8 -20.88,-223.2
  text "1" at 9.12,65.3 h1.78
  text "2" at 69.12,65.3 h1.78
  text "3" at 129.12,65.3 h1.78
  text "A" at -23.88,29.175 h1.78
  text "A" at 161.12,29.175 h1.78
  text "'.Layer_Name'" at 130,22.5 h2.5
  text "B" at -23.88,-45.075 h1.78
  text "B" at 161.12,-45.075 h1.78
  text "C" at -23.88,-119.325 h1.78
  text "C" at 161.12,-119.325 h1.78
  text "D" at -23.88,-191.575 h1.78
  text "D" at 161.12,-191.575 h1.78
  text "ENGINEER:" at 18.497,-195.053 h1.14
  text "PROJECT NAME:" at 73.937,-195.053 h1.14
  text "'.ProjectName'" at 87.71,-198.2 h3
  text "'._HWEngineer'" at 20.909,-198.445 h1.52
  text "PCB DESIGNER:" at 18.497,-202.546 h1.14
  text "BOARD NAME:" at 73.937,-202.553 h1.14
  text "'._CompanyName'" at -15.88,-204.2 h1.78
  text "'._BoardName'" at 87.71,-205.95 h3
  text "'._HWEngineer'" at 20.782,-206.192 h1.52
  text "'._address1'" at -15.88,-209.2 h1.78
  text "DATE:" at 18.497,-210.293 h1.14
  text "PART NO.:" at 73.937,-210.293 h1.14
  text "Ver:" at 127.277,-210.293 h1.14
  text "'._address2'" at -15.88,-211.7 h1.78
  text "'._Revision'" at 136.365,-212.96 h3
  text "'._DocumentDate'" at 20.782,-213.05 h1.78
  text "'._PCBModel'" at 87.71,-213.7 h3
  text "'._address3'" at -15.88,-214.2 h1.27
  text "'._address4'" at -15.88,-216.7 h1.27
  text "FILE NAME:" at 18.497,-217.913 h1.14
  text "SCH. NO.:" at 73.937,-217.913 h1.14
  text "SCALE:" at 127.277,-217.913 h1.14
  text "A4 M1:1" at 137,-220.58 h3
  text "'.ProjectNumber'" at 87.71,-221.2 h3
  text "'.Pcb_File_Name_No_Path'" at 20.846,-221.339 h1.78
  text "1" at 9.12,-226.7 h1.78
  text "2" at 69.12,-226.7 h1.78
  text "3" at 129.12,-226.7 h1.78
Drill Drawing:
  text "'.Layer_Name'" at 130,-2.5 h2.5
  text ".Legend" at -17.5,-185 h3.5
Courtyard BOT:
  text "'.Layer_Name'" at 145,20 h2.5
BOT ASSY:
  text "'.Layer_Name'" at 145,7.5 h2.5
Layer Stack:
  drawing of 317 lines, arcs and shapes, not listed
  text "'.Layer_Name'" at 130,-5.5 h2.5
  text "Layer" at 12.267,-152.207 h1.52
  text "Name" at 22.679,-152.207 h1.52
  text "Material" at 46.294,-152.207 h1.52
  text "Thickness" at 68.64,-152.207 h1.52
  text "Constant" at 85.146,-152.207 h1.52
  text "Board Layer Stack" at 99.621,-152.207 h1.52
  text "1" at 12.267,-155.255 h1.52
  text "Top Overlay" at 22.679,-155.255 h1.52
  text "2" at 12.267,-158.303 h1.52
  text "Top Solder" at 22.679,-158.303 h1.52
  text "PI + Adhesive" at 46.294,-158.303 h1.52
  text "0.028mm" at 68.64,-158.303 h1.52
  text "3.4" at 85.146,-158.303 h1.52
  text "3" at 12.267,-161.351 h1.52
  text "1-SIG-TOP" at 22.679,-161.351 h1.52
  text "Copper" at 46.294,-161.351 h1.52
  text "0.035mm" at 68.64,-161.351 h1.52
  text "4" at 12.267,-164.399 h1.52
  text "Dielectric 1" at 22.679,-164.399 h1.52
  text "PI" at 46.294,-164.399 h1.52
  text "0.038mm" at 68.64,-164.399 h1.52
  text "3.4" at 85.146,-164.399 h1.52
  text "5" at 12.267,-167.447 h1.52
  text "2-SIG_BOT" at 22.679,-167.447 h1.52
  text "Copper" at 46.294,-167.447 h1.52
  text "0.035mm" at 68.64,-167.447 h1.52
  text "6" at 12.267,-170.495 h1.52
  text "Bottom Solder" at 22.679,-170.495 h1.52
  text "PI + Adhesive" at 46.294,-170.495 h1.52
  text "0.028mm" at 68.64,-170.495 h1.52
  text "3.4" at 85.146,-170.495 h1.52
  text "7" at 12.267,-173.543 h1.52
  text "Bottom Overlay" at 22.679,-173.543 h1.52

## Dimensions
5,1.5 to 0,1.2 on PCB Mech TOP
102,-1.7 to 100,0.5 on PCB Mech TOP
101.7,2 to 101.7,-2 on PCB Mech TOP
101.7,1.7 to 104.141,4.141 on PCB Mech TOP
0.3,1.5 to 0.3,-1.5 on PCB Mech TOP
0.3,1.2 to -1.9,3.6 on PCB Mech TOP
102,-1.7 to 78,-2 on PCB Mech TOP
102,-1.7 to 0,1.2 on PCB Mech TOP
78.7,1.3 to 81.3,1.3 on PCB Mech TOP
100,0.5 to 80,0.5 on PCB Mech TOP
0,1.2 to 5,0 on Dimensions
98,-2 to 98,2 on Dimensions
0.3,-1.5 to 0.3,1.5 on Dimensions
7.1,1.7 to 6.2,4.9 on Dimensions
101.7,1.7 to 106.4,6.8 on Dimensions
0.3,1.2 to -3.028,6.964 on Dimensions
0,-1.2 to 10.5,0.2 on Dimensions

## Text inside footprints (layer, text, board x,y; h text height)
Logo1: Bottom Overlay "CPU" at 16.98,-1.249 h2.5; Bottom Overlay "Acme" at 27.991,-1.245 h2.5